# Altium PCB PCB_v2.PcbDoc
Units mm, origin at the board's own origin, x right, y up, seen from the top; angles counter-clockwise.
Board outline 100 x 100 mm, 2 copper layers (Top Layer, Bottom Layer); 42 components, 45 nets, 150 pads, 0 vias.
Unrouted connection lines stored in the file: 13.
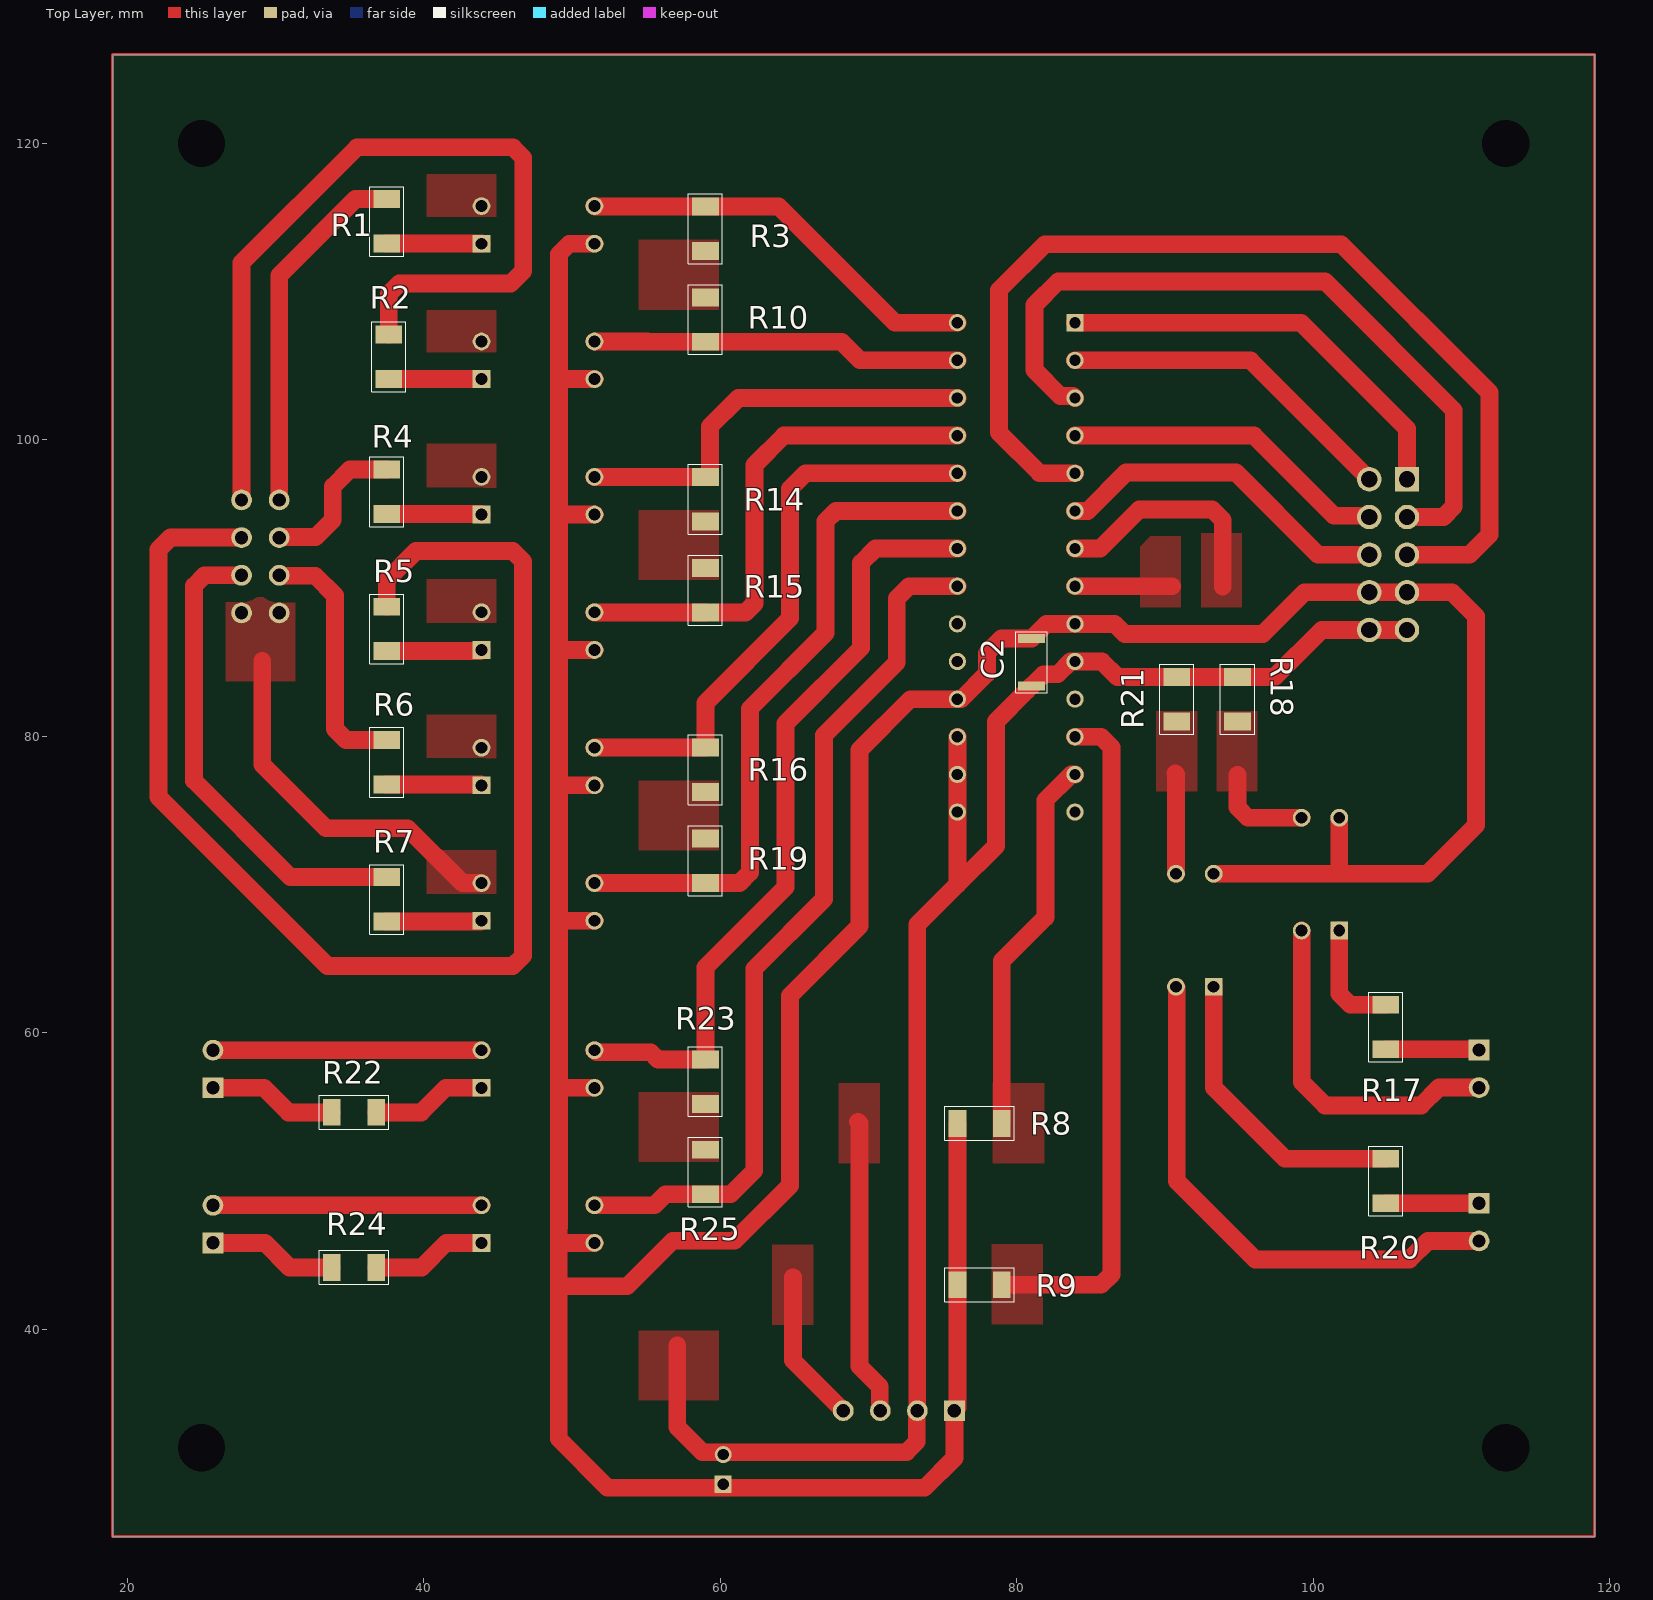
[diagram p0: Top Layer view]
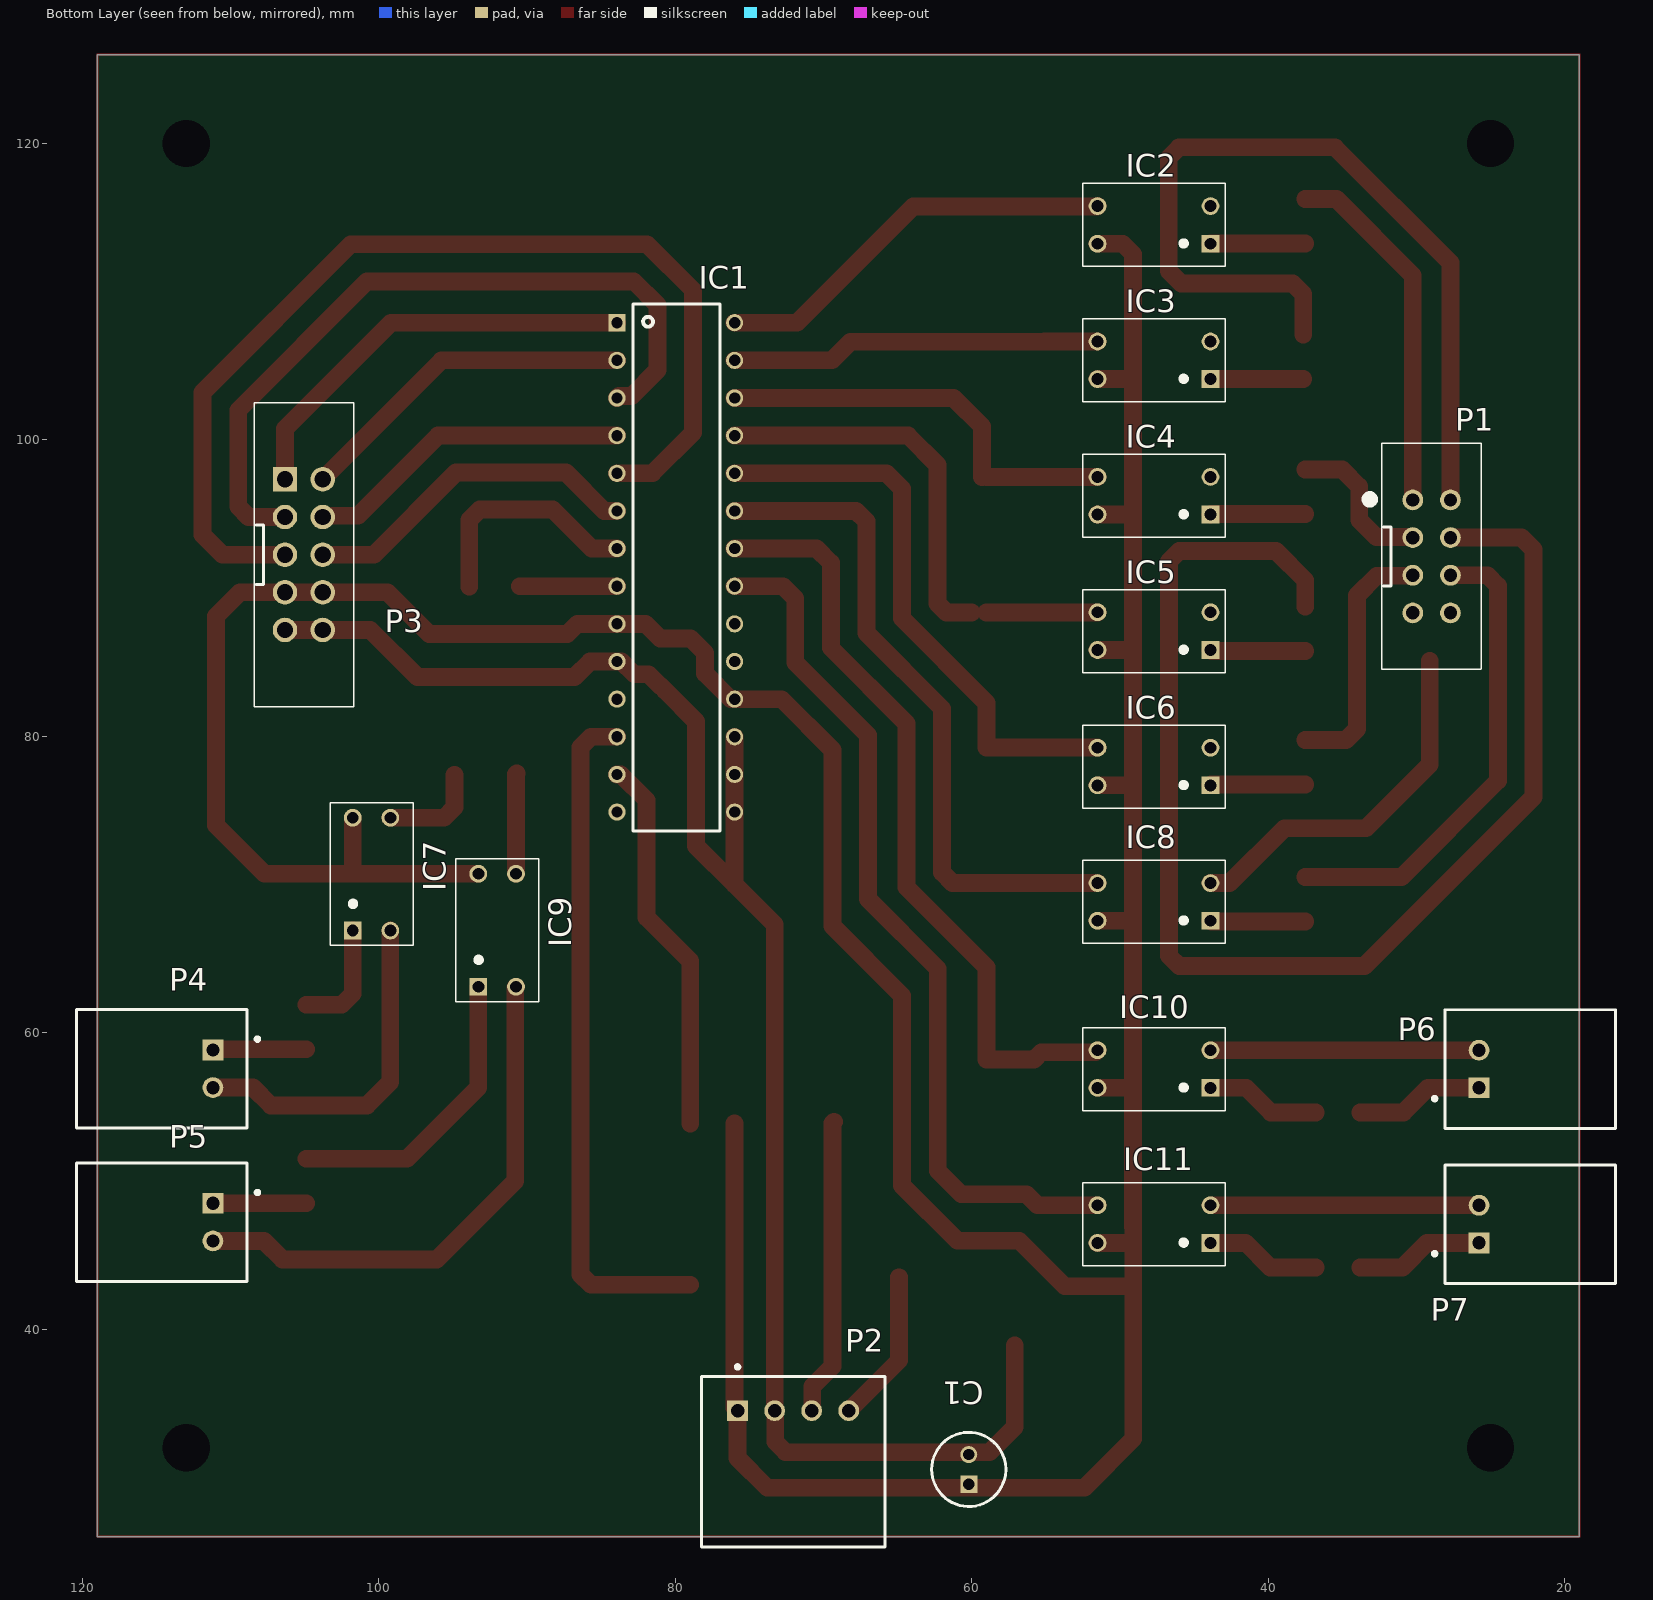
[diagram p1: Bottom Layer view, seen from below]
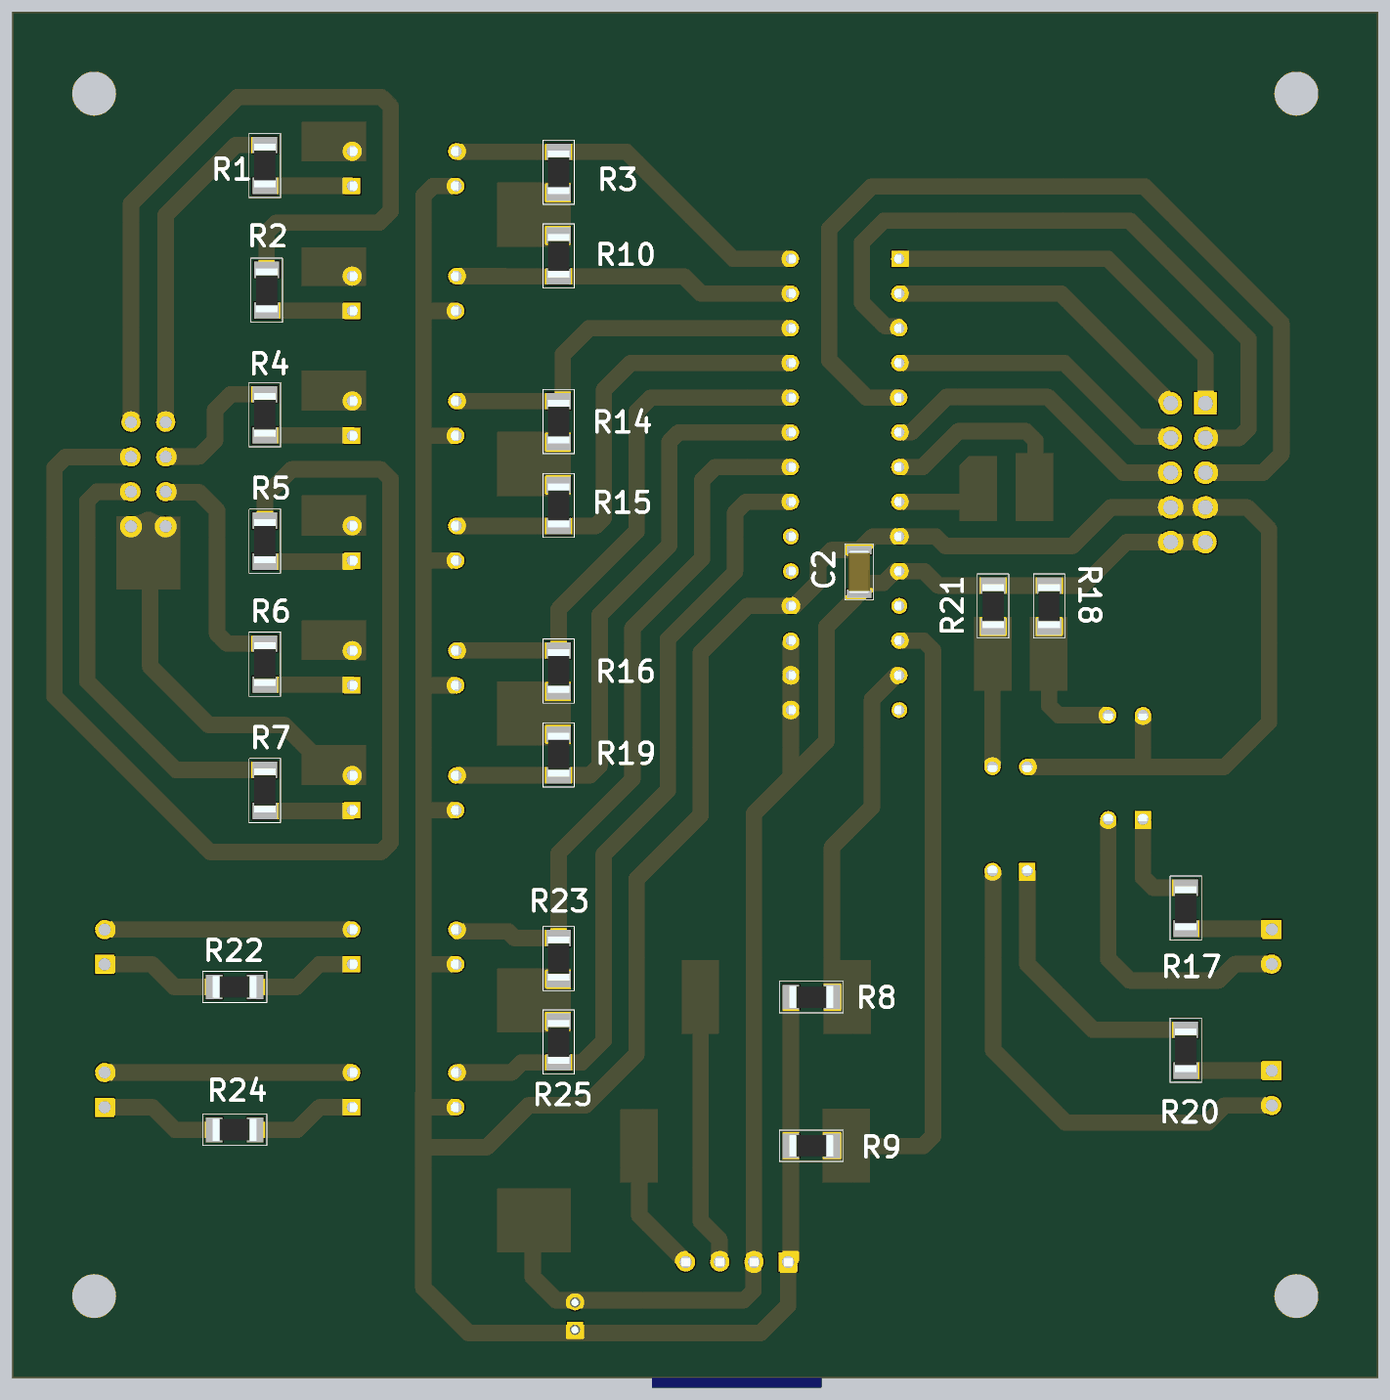
[diagram p2: 3D render of the assembled board from above, using the file's embedded part models]
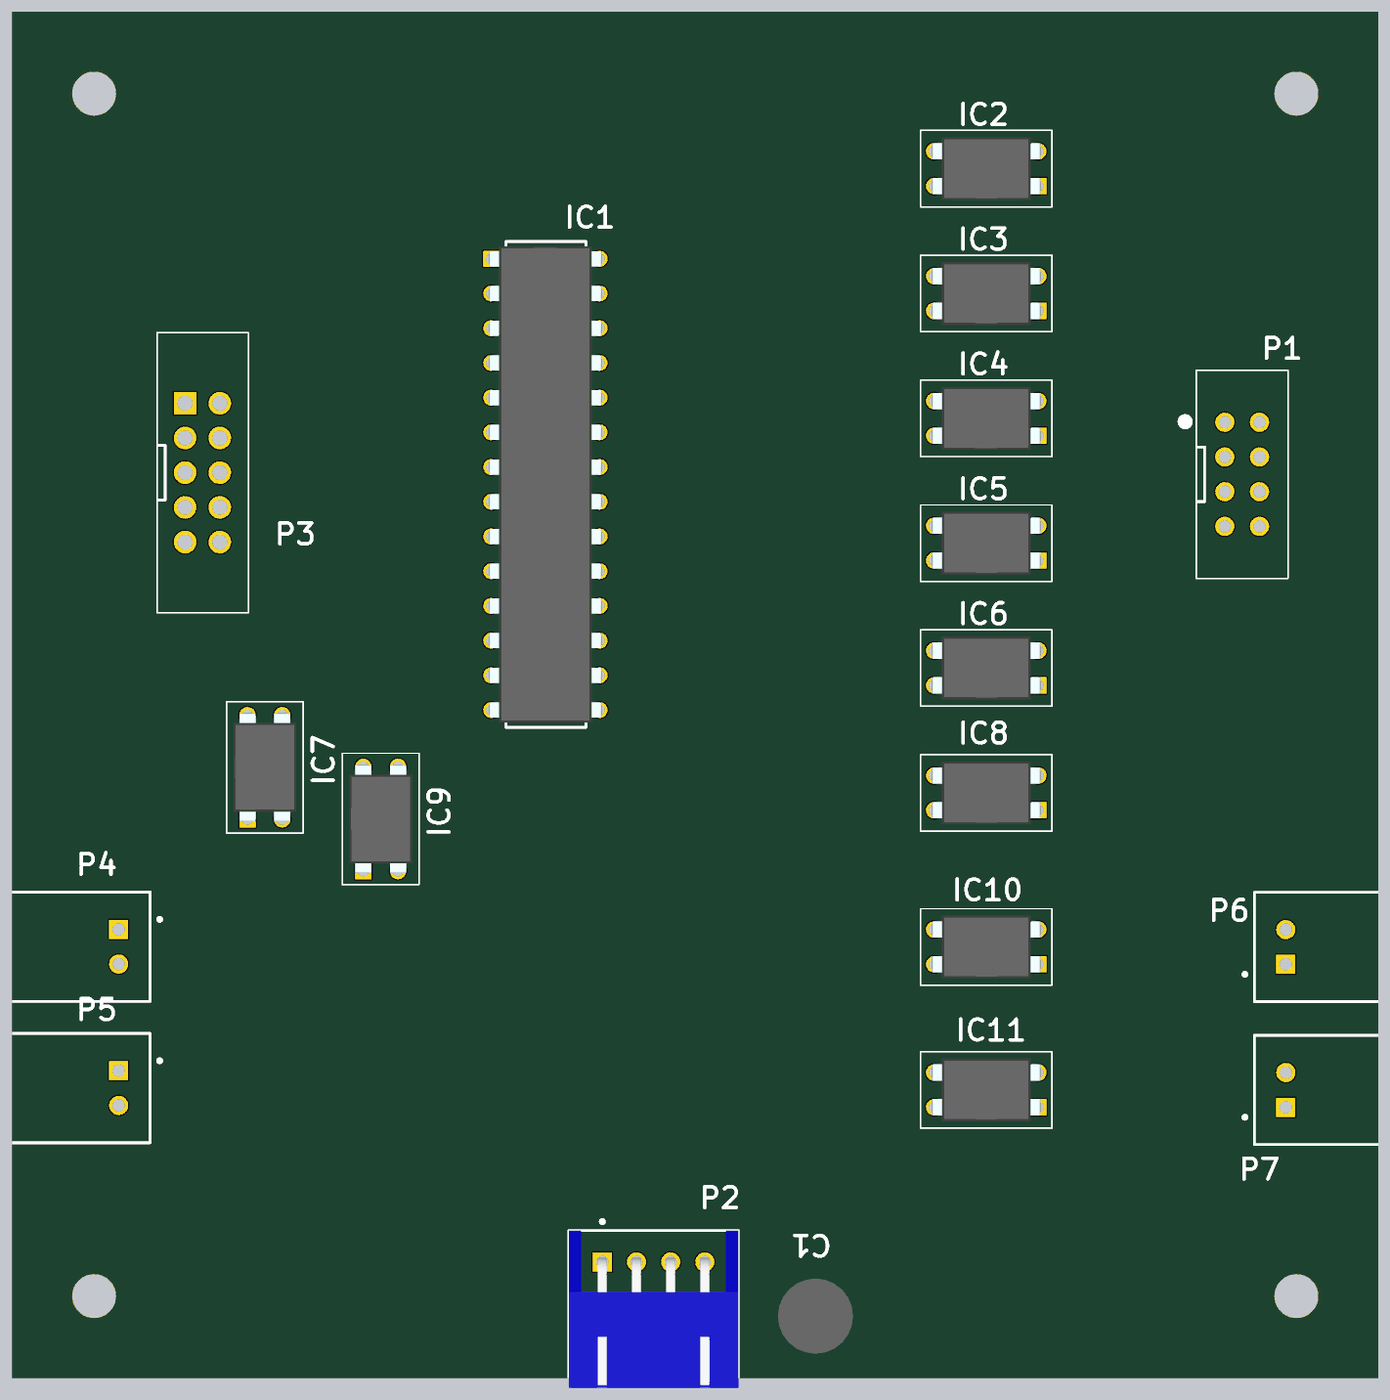
[diagram p3: 3D render of the assembled board from below, using the file's embedded part models]

## Layer stack, top to bottom
Top Solder: solder mask 0.0102, Solder Resist, Dk 3.5
Top Layer: signal copper 0.0356
Dielectric 1: dielectric 0.32, FR-4, Dk 4.8
Bottom Layer: signal copper 0.0356
Bottom Solder: solder mask 0.0102, Solder Resist, Dk 3.5

## Board outline
19,26 119,26 119,126 19,126

## Design rules (kind name [scope] priority, off if disabled: settings)
Clearance [All] p1: gap=1 ignorepadtopadclearanceinfootprint=FALSE except(0.5: THPad-THPad THPad-Fill THPad-Poly THPad-Region Via-Via Via-Fill Via-Poly Via-Region; 0.8: Arc-THPad Track-THPad; 1.2: Arc-Arc Arc-Track Arc-Fill Arc-Poly Arc-Region Track-Track Track-Fill Track-Poly Track-Region Fill-Fill Fill-Poly Fill-Region Poly-Poly Poly-Region Region-Region; 1.5: Arc-SMDPad Track-SMDPad SMDPad-Fill SMDPad-Poly SMDPad-Region)
ComponentClearance [All] p1: gap=1 collisioncheckmode=3 verticalgap=0.254 showdistances=FALSE
PolygonConnect [All] p1: thpad.connectstyle=Direct thpad.reliefconductorwidth=0.254 thpad.reliefentries=4 thpad.polygonreliefangle="90 Angle" thpad.airgapwidth=0.254 smdpad.connectstyle=Direct smdpad.reliefconductorwidth=0.254 smdpad.reliefentries=4 smdpad.polygonreliefangle="90 Angle" smdpad.airgapwidth=0.254 via.connectstyle=Relief via.reliefconductorwidth=0.254 via.reliefentries=4 via.polygonreliefangle="90 Angle" via.airgapwidth=0.254
RoutingVias [All] p1: holewidth=0.711 width=1.27 viastyle="Through Hole" minholewidth=0.711 minwidth=1.27 maxholewidth=0.711 maxwidth=1.27
SolderMaskExpansion [All] p1: expansion=0.102 istentingtop=FALSE
Width [All] p1: maxlimit=1.2 minlimit=1.2 preferedwidth=1.2
29 further rules are at their usual default settings.

## Components (designator, comment, footprint, x,y, rotation, side; value= is the part's Value field where it differs from the comment)
C1 "EEU-FR1V330" CAPPRD200W55D500H1250 60.201,29.536 r90 bottom
C2 "C3216C0G1H683J160AE" CAPC3216X180N 81,85 r90 top
IC1 "MCP23017-E_SP" DIP794W56P254L3486H508Q28N 79.969,91.4 r180 bottom
IC2 "LTV-817-B" DIP762W60P254L460H420Q4N 47.701,114.508 r0 bottom
IC3 "LTV-817-B" DIP762W60P254L460H420Q4N 47.701,105.372 r0 bottom
IC4 "LTV-817-B" DIP762W60P254L460H420Q4N 47.701,96.236 r0 bottom
IC5 "LTV-817-B" DIP762W60P254L460H420Q4N 47.701,87.1 r0 bottom
IC6 "LTV-817-B" DIP762W60P254L460H420Q4N 47.701,77.964 r0 bottom
IC7 "LTV-817-B" DIP762W60P254L460H420Q4N 100.5,70.7 r90 bottom
IC8 "LTV-817-B" DIP762W60P254L460H420Q4N 47.701,68.828 r0 bottom
IC9 "LTV-817-B" DIP762W60P254L460H420Q4N 92.023,66.918 r90 bottom
IC10 "LTV-817-B" DIP762W60P254L460H420Q4N 47.701,57.552 r0 bottom
IC11 "LTV-817-B" DIP762W60P254L460H420Q4N 47.701,47.091 r0 bottom
P1 "IDC-8pin" IDC-8PIN 28.97,92.14 r270 bottom
P2 "S4B-XH-A(LF)(SN)" JST-S4B-XH-A(LF)(SN)_V 72.05,34.5 r180 bottom
P3 "IDC-10pin" IDC-10PIN 105.05,92.26 r270 bottom
P4 "2-pin_connector" 2-pin_connector 111.2,57.57 r270 bottom
P5 "2-pin_connector" 2-pin_connector 111.2,47.224 r270 bottom
P6 "2-pin_connector" 2-pin_connector 25.771,57.552 r90 bottom
P7 "2-pin_connector" 2-pin_connector 25.771,47.091 r90 bottom
R1 "CR1206-FW-1504ELF" RESC3216X75N 37.5,114.75 r90 top
R2 "CR1206-FW-1504ELF" RESC3216X75N 37.633,105.61 r90 top
R3 "CR1206-FW-1504ELF" RESC3216X75N 59,114.25 r270 top
R4 "CR1206-FW-1504ELF" RESC3216X75N 37.5,96.5 r90 top
R5 "CR1206-FW-1504ELF" RESC3216X75N 37.5,87.25 r90 top
R6 "CR1206-FW-1504ELF" RESC3216X75N 37.5,78.25 r90 top
R7 "CR1206-FW-1504ELF" RESC3216X75N 37.5,69 r90 top
R8 "CR1206-FW-1504ELF" RESC3216X75N 77.5,53.881 r180 top
R9 "CR1206-FW-1504ELF" RESC3216X75N 77.5,43 r180 top
R10 "CR1206-FW-1504ELF" RESC3216X75N 59,108.121 r90 top
R14 "CR1206-FW-1504ELF" RESC3216X75N 59,96 r270 top
R15 "CR1206-FW-1504ELF" RESC3216X75N 59,89.861 r90 top
R16 "CR1206-FW-1504ELF" RESC3216X75N 59,77.75 r270 top
R17 "CR1206-FW-1504ELF" RESC3216X75N 104.9,60.392 r90 top
R18 "CR1206-FW-1504ELF" RESC3216X75N 94.9,82.5 r90 top
R19 "CR1206-FW-1504ELF" RESC3216X75N 59,71.611 r90 top
R20 "CR1206-FW-1504ELF" RESC3216X75N 104.9,50 r90 top
R21 "CR1206-FW-1504ELF" RESC3216X75N 90.8,82.5 r90 top
R22 "CR1206-FW-1504ELF" RESC3216X75N 35.291,54.627 r0 top
R23 "CR1206-FW-1504ELF" RESC3216X75N 59,56.7 r270 top
R24 "CR1206-FW-1504ELF" RESC3216X75N 35.291,44.166 r0 top
R25 "CR1206-FW-1504ELF" RESC3216X75N 59,50.6 r90 top

## Footprints (in the part's own frame and the unit in brackets; to place one, negate y for a bottom-side part, rotate by r counter-clockwise, add the part's x,y. Pads: shape width x height; smd on the part's side, far side on the other; paste and mask are expansions set on the pad)
2-pin_connector [mm] "Шаг 2.54мм"
  rect 1.4x1.4 hole 0.9: 1(-1.27,0)
  round 1.4 hole 0.9: 2(1.27,0)
  silkscreen extent -4,-9.2 4,3.12
CAPC3216X180N [mm]
  rect 0.62x1.82 smd: 1(-1.6,0) 2(1.6,0)
  silkscreen extent -2.06,-1.06 2.06,1.06, body extent -1.6,-0.8 1.6,0.8, height 1.8
CAPPRD200W55D500H1250 [mm]
  rect 1.15x1.15 hole 0.75: 1(0,0)
  round 1.15 hole 0.75: 2(2,0)
  silkscreen extent -1.5,-2.5 3.5,2.5, body extent -1.75,-2.75 3.75,2.75, height 12.5
DIP762W60P254L460H420Q4N [mm]
  rect 1.2x1.2 hole 0.8: 1(-3.81,1.27)
  round 1.2 hole 0.8: 2(-3.81,-1.27) 3(3.81,-1.27) 4(3.81,1.27)
  silkscreen extent -4.81,-2.8 4.81,2.8, body extent -3.96,-2.3 3.96,2.3, height 4.2
DIP794W56P254L3486H508Q28N [mm]
  rect 1.159x1.159 hole 0.759: 1(-3.969,16.51)
  round 1.159 hole 0.759: 2(-3.969,13.97) 3(-3.969,11.43) 4(-3.969,8.89) 5(-3.969,6.35) 6(-3.969,3.81) 7(-3.969,1.27) 8(-3.969,-1.27) 9(-3.969,-3.81) 10(-3.969,-6.35) 11(-3.969,-8.89) 12(-3.969,-11.43) 13(-3.969,-13.97) 14(-3.969,-16.51) 15(3.969,-16.51) 16(3.969,-13.97) 17(3.969,-11.43) 18(3.969,-8.89) 19(3.969,-6.35) 20(3.969,-3.81) 21(3.969,-1.27) 22(3.969,1.27) 23(3.969,3.81) 24(3.969,6.35) 25(3.969,8.89) 26(3.969,11.43) 27(3.969,13.97) 28(3.969,16.51)
  silkscreen extent -2.88,-17.78 2.98,17.78, body extent -4.11,-17.43 4.11,17.43, height 5.08
IDC-8PIN [mm]
  round 1.4 hole 0.9: 1(-3.81,-1.27) 2(-3.81,1.27) 3(-1.27,-1.27) 4(-1.27,1.27) 5(1.27,-1.27) 6(1.27,1.27) 7(3.81,-1.27) 8(3.81,1.27)
  silkscreen extent -7.62,-4.38 7.62,3.35
IDC-10PIN [mm]
  rect 1.65x1.65 hole 1.1: 1(-5.08,-1.29)
  round 1.65 hole 1.1: 2(-5.08,1.25) 3(-2.54,-1.29) 4(-2.54,1.25) 5(0,-1.29) 6(0,1.25) 7(2.54,-1.29) 8(2.54,1.25) 9(5.08,-1.29) 10(5.08,1.25)
  silkscreen extent -10.25,-3.35 10.25,3.35
JST-S4B-XH-A(LF)(SN)_V [mm] "Header, 4-Leads, Body 12.4x11.5mm, Pitch 2.5mm"
  rect 1.4x1.4 hole 0.9: 1(-3.75,0)
  round 1.4 hole 0.9: 2(-1.25,0) 3(1.25,0) 4(3.75,0)
  silkscreen extent -6.2,-9.2 6.2,3.08, body extent -6.2,-9.2 6.2,2.3, height 6.15
RESC3216X75N [mm]
  rect 1.2x1.8 smd: 1(-1.5,0) 2(1.5,0)
  silkscreen extent -2.35,-1.15 2.35,1.15, body extent -1.6,-0.8 1.6,0.8, height 0.75

## Part data
C1: "Capacitor Polarised", Manufacturer_Name=Panasonic, Mouser Part Number=667-EEU-FR1V330, Datasheet Link=https://componentsearchengine.com/Datasheets/1/EEU-FR1V330.pdf, Height=12.5mm, Manufacturer_Part_Number=EEU-FR1V330, Mouser Price/Stock=http://www.mouser.com/Search/ProductDetail.aspx?qs=ob%252bdNz2%252bYEhHeC0uCpfxxQ%3d%3d
C2: "Capacitor", Manufacturer_Name=TDK, Mouser Part Number=810-C3216C0G1H683J16, Datasheet Link=https://product.tdk.com/info/en/catalog/datasheets/mlcc_commercial_midvoltage_en.pdf, Height=1.8mm, Manufacturer_Part_Number=C3216C0G1H683J160AE, Mouser Price/Stock=https://www.mouser.co.uk/ProductDetail/TDK/C3216C0G1H683J160AE?qs=P1JMDcb91o7iXP%252BmsCRcbg%3D%3D
IC1: "Integrated Circuit", Arrow Part Number=MCP23017-E/SP, Manufacturer_Name=Microchip, Mouser Part Number=579-MCP23017-E/SP, Arrow Price/Stock=https://www.arrow.com/en/products/mcp23017-esp/microchip-technology, Datasheet Link=http://docs-emea.rs-online.com/webdocs/137e/0900766b8137eed4.pdf, Height=5.08mm, Manufacturer_Part_Number=MCP23017-E/SP, Mouser Price/Stock=https://www.mouser.co.uk/ProductDetail/Microchip-Technology/MCP23017-E-SP?qs=usxtMOJb1RyESXZDw7ia5A%3D%3D
IC2 IC3 IC4 IC5 IC6 IC7 IC8 IC9 IC10 IC11: "Integrated Circuit", Manufacturer_Name=Lite-On, Mouser Part Number=N/A, Arrow Part Number=LTV-817-B, Arrow Price/Stock=https://www.arrow.com/en/products/ltv-817-b/lite-on-technology, Datasheet Link=http://optoelectronics.liteon.com/upload/download/DS-70-96-0016/LTV-8X7%20series%20201610%20.pdf, Height=4.2mm, Manufacturer_Part_Number=LTV-817-B, Mouser Price/Stock=https://www.mouser.co.uk/ProductDetail/Lite-On/LTV-817-B?qs=5Clb0NIqk7HzP4M9tIz87Q%3D%3D
P2: "Male Header, Pitch 2.5 mm, 1 x 4 Position, Height 6.1 mm, Tail Length 3.4 mm, -25 to 85 degC, RoHS, Bulk", ComponentLink1Description="Manufacturer URL", ComponentLink1URL=http://www.jst.com/home2.html, ComponentLink2Description=Datasheet, ComponentLink2URL=http://www.jst-mfg.com/product/pdf/eng/eXH.pdf, DatasheetVersion=May-16, PackageDescription="Male Header, Pitch 2.5 mm, 1 x 4 Position, Height 6.1 mm, Tail Length 3.4 mm", PackageReference=S4B-XH-A(LF)(SN)
R1 R2 R3 R4 R5 R6 R7 R8 R9 R10 R14 R15 R16 R17 R18 R19 R20 R21 R22 R23 R24 R25: "Resistor", Manufacturer_Name=Bourns, Mouser Part Number=652-CR1206FW1504ELF, Arrow Part Number=CR1206-FW-1504ELF, Arrow Price/Stock=https://www.arrow.com/en/products/cr1206-fw-1504elf/bourns, Datasheet Link=http://componentsearchengine.com/Datasheets/1/CR1206-FW-1504ELF.pdf, Height=0.75mm, Manufacturer_Part_Number=CR1206-FW-1504ELF, Mouser Price/Stock=https://www.mouser.co.uk/ProductDetail/Bourns/CR1206-FW-1504ELF/?qs=6oMev5NRZMFfvXkOpYL2%252BA%3D%3D
P1 P3: ComponentLink1Description="Manufacturer URL", ComponentLink2Description=Datasheet, DatasheetVersion=May-16, PackageReference=IDC-8pin
P4 P5 P6 P7: ComponentLink1Description="Manufacturer URL", ComponentLink2Description=Datasheet, DatasheetVersion=May-16

## Free pads (board coordinates)
  round 1 hole 3.2: 9(25,32) 9(25,120) 9(113,32) 9(113,120)

## Nets (pads, with @x,y where several pads share a name; then routed paths per layer and width w, separated by ;. In a path a pad name is that pad's centre, name@x,y a point inside that pad or via, vN(x,y) a via of type N, cw(c..) or ccw(c..) an arc to the next point about the centre after c; other vN are vias at no path point)
+3.3V_RPI: C1.1 C2.2 IC1.9 IC1.18 IC2.4 IC3.4 IC4.4 IC5.4 IC6.4 IC7.4 IC8.4 IC9.4 IC10.4 IC11.4 P2.1 P3.7 P3.8 R8.2 R9.2 | length 285.7
  Top Layer w1.2: 49.1,46.889 49.1,45.8 ; 49.111,46.889 49.111,56.3 ; 49.2,67.558 IC8.4 ; 49.3,42.897 53.727,42.897 56.792,45.961 60.961,45.961 64.7,49.7 64.7,62.5 69.4,67.2 69.4,79.081 72.829,82.51 IC1.18 76.259,82.51 77.99,84.241 77.99,85.621 78.969,86.6 C2.2 81.02,86.6 82.01,87.59 86.604,87.59 87.294,86.9 96.6,86.9 99.42,89.72 P3.8 P3.7 109.38,89.72 111,88.1 111,74 107.728,70.728 101.6,70.728 ; IC11.4 49.121,45.821 49.1,45.8 ; IC10.4 49.13,56.282 49.111,56.3 ; IC6.4 49.167,76.694 49.111,76.75 ; IC5.4 49.281,85.83 49.111,86 ; IC4.4 49.145,94.966 49.111,95 ; IC3.4 49.214,104.102 49.111,104 ; IC2.4 49.814,113.238 49.111,112.535 49.111,104 ; R8.2 76,53.581 R9.2 76,34.7 P2.1 75.8,31.3 73.8,29.3 52.4,29.3 49.1,32.6 49.1,45.8 ; IC9.4 101.6,70.728 ; IC7.4 101.77,70.898 101.6,70.728 ; 49.111,56.3 49.111,76.75 ; 49.111,76.75 49.111,86 ; 49.111,86 49.111,95 ; 49.111,95 49.111,104
ADD_SIG_1: IC1.7 IC7.3 R18.1 | length 22.6
  Top Layer w1.2: IC1.7 85.646,92.67 88.276,95.3 93.197,95.3 93.9,94.597 93.9,90.1 ; 94.9,77.4 94.9,75.213 95.603,74.51 IC7.3
ADD_SIG_2: IC1.8 IC9.3 R21.1 | length 13.4
  Top Layer w1.2: IC1.8 90.5,90.13 ; 90.7,77.5 90.753,77.447 IC9.3
ADD_SIG_3: IC1.22 IC10.3 R23.1 | length 52.5
  Top Layer w1.2: IC10.3 51.651,58.682 55.318,58.682 55.8,58.2 R23.1 59,64.419 64.4,69.819 64.4,80.869 69.506,85.976 69.506,91.706 70.47,92.67 IC1.22
ADD_SIG_4: IC1.21 IC11.3 R25.1 | length 58.8
  Top Layer w1.2: IC11.3 55.561,48.361 56.3,49.1 R25.1 60.706,49.1 62.3,50.694 62.3,64.325 67,69.025 67,80.075 71.906,84.981 71.906,89.306 72.73,90.13 IC1.21
ARD_SIG_1: IC1.1 P3.1 | length 28.8
  Top Layer w1.2: IC1.1 99.19,107.91 106.34,100.76 P3.1
ARD_SIG_2: IC1.2 P3.2 | length 23.2
  Top Layer w1.2: IC1.2 95.77,105.37 P3.2
ARD_SIG_3: IC1.3 P3.3 | length 50.4
  Top Layer w1.2: IC1.3 83.798,102.97 82.944,102.97 81.2,104.714 81.2,109.1 82.8,110.7 100.8,110.7 109.5,102 109.5,95.503 108.797,94.8 P3.3
ARD_SIG_4: IC1.4 P3.4 | length 22.1
  Top Layer w1.2: IC1.4 96.01,100.29 101.414,94.886 103.714,94.886 P3.4
ARD_SIG_5: IC1.5 P3.5 | length 70.1
  Top Layer w1.2: IC1.5 81.55,97.75 78.8,100.5 78.8,110.094 81.906,113.2 101.9,113.2 111.9,103.2 111.9,93.6 110.56,92.26 P3.5
ARD_SIG_6: IC1.6 P3.6 | length 23.2
  Top Layer w1.2: IC1.6 84.792,95.21 87.382,97.8 94.794,97.8 100.334,92.26 P3.6
LAMP_SIG_1: IC1.28 IC2.3 R3.1 | length 27.7
  Top Layer w1.2: IC2.3 51.541,115.749 58.348,115.749 58.349,115.75 R3.1 63.95,115.75 71.79,107.91 IC1.28
LAMP_SIG_2: IC1.27 IC3.3 R10.1 | length 25
  Top Layer w1.2: IC3.3 55.095,106.642 55.117,106.621 R10.1 68.179,106.621 69.43,105.37 IC1.27
LAMP_SIG_3: IC1.26 IC4.3 R14.1 | length 28.4
  Top Layer w1.2: IC4.3 55.103,97.506 55.109,97.5 R14.1 ; R14.1@59.3,97.5 59.3,100.9 61.23,102.83 IC1.26
LAMP_SIG_4: IC1.25 IC5.3 R15.1 | length 33.9
  Top Layer w1.2: IC5.3 51.52,88.361 R15.1 ; 60.023,88.351 61.7,88.351 62.306,88.958 62.306,98.306 64.29,100.29 IC1.25
LAMP_SIG_5: IC1.24 IC6.3 R16.1 | length 39
  Top Layer w1.2: IC6.3 51.528,79.251 58.699,79.251 R16.1 59,82.257 64.706,87.964 64.706,90.589 64.706,96.706 65.75,97.75 IC1.24
LAMP_SIG_6: IC1.23 IC8.3 R19.1 | length 45.8
  Top Layer w1.2: IC8.3 51.524,70.111 R19.1 61.297,70.111 62,70.813 62,81.863 67.106,86.97 67.106,89.595 67.106,94.507 67.809,95.21 IC1.23
NetIC2_1: IC2.1 R1.1 | length 6.4
  Top Layer w1.2: R1.1 43.88,113.25 IC2.1
NetIC3_1: IC3.1 R2.1 | length 6.3
  Top Layer w1.2: R2.1 43.884,104.11 IC3.1
NetIC4_1: IC4.1 R4.1 | length 6.4
  Top Layer w1.2: R4.1 43.858,95 IC4.1
NetIC5_1: IC5.1 R5.1 | length 6.4
  Top Layer w1.2: R5.1 43.811,85.75 IC5.1
NetIC6_1: IC6.1 R6.1 | length 6.4
  Top Layer w1.2: R6.1 43.836,76.75 IC6.1
NetIC7_1: IC7.1 R17.2 | length 7.7
  Top Layer w1.2: IC7.1 101.77,62.63 102.508,61.892 R17.2
NetIC7_2: IC7.2 P4.2 | length 23.3
  Top Layer w1.2: IC7.2 99.23,56.67 100.8,55.1 107.3,55.1 108.5,56.3 P4.2
NetIC8_1: IC8.1 R7.1 | length 6.4
  Top Layer w1.2: R7.1 43.833,67.5 IC8.1
NetIC9_1: IC9.1 R20.2 | length 20.4
  Top Layer w1.2: IC9.1 93.3,63.101 93.3,56.3 98.1,51.5 R20.2
NetIC9_2: IC9.2 P5.2 | length 36.2
  Top Layer w1.2: IC9.2 90.8,63.061 90.8,50 96.1,44.7 106.5,44.7 107.754,45.954 P5.2
NetIC10_1: IC10.1 R22.2 | length 7.8
  Top Layer w1.2: R22.2 39.827,54.627 41.482,56.282 IC10.1
NetIC10_2: IC10.2 P6.2 | length 18.1
  Top Layer w1.2: P6.2 IC10.2
NetIC11_1: IC11.1 R24.2 | length 7.8
  Top Layer w1.2: R24.2 39.866,44.166 41.521,45.821 IC11.1
NetIC11_2: IC11.2 P7.2 | length 18.1
  Top Layer w1.2: P7.2 IC11.2
NetP1_1: P1.1 R1.2 | length 24.5
  Top Layer w1.2: P1.1 30.24,111.096 35.394,116.25 R1.2
NetP1_2: P1.2 R2.2 | length 58.6
  Top Layer w1.2: P1.2 27.7,111.95 35.5,119.75 46.008,119.75 46.711,119.047 46.711,111.403 45.858,110.55 38.336,110.55 37.633,109.847 R2.2
NetP1_3: P1.3 R4.2 | length 10.5
  Top Layer w1.2: P1.3 30.278,93.448 32.698,93.448 33.849,94.599 33.849,96.849 35,98 R4.2
NetP1_4: P1.4 R5.2 | length 90.9
  Top Layer w1.2: P1.4 22.903,93.41 22.1,92.607 22.1,75.9 33.5,64.5 45.997,64.5 46.7,65.203 46.7,91.797 45.997,92.5 39.47,92.5 37.5,90.53 R5.2
NetP1_5: P1.5 R6.2 | length 17.1
  Top Layer w1.2: P1.5 30.278,90.832 32.668,90.832 34,89.5 34,80.5 34.75,79.75 R6.2
NetP1_6: P1.6 R7.2 | length 32.4
  Top Layer w1.2: P1.6 25.203,90.87 24.5,90.167 24.5,77 31,70.5 R7.2
NetP4_1: P4.1 R17.1 | length 6.3
  Top Layer w1.2: R17.1 R17.1@105.2,58.892 ; R17.1@105.2,58.891 111.149,58.891 P4.1
NetP5_1: P5.1 R20.1 | length 6.3
  Top Layer w1.2: R20.1 111.194,48.5 P5.1
NetP6_1: P6.1 R22.1 | length 8.7
  Top Layer w1.2: P6.1 29.218,56.282 30.873,54.627 R22.1
NetP7_1: P7.1 R24.1 | length 8.7
  Top Layer w1.2: P7.1 29.279,45.821 30.934,44.166 R24.1
RPI_GND: C1.2 C2.1 IC1.10 IC1.15 IC1.16 IC1.17 P2.2 P3.9 P3.10 R3.2 R10.2 R14.2 R15.2 R16.2 R18.2 R19.2 R21.2 R23.2 R25.2 | length 114.6
  Top Layer w1.2: 57.1,38.9 57.1,33.4 58.8,31.7 60.201,31.7 72.559,31.7 73.262,32.403 73.262,34.462 P2.2 73.3,67.3 76,70 ; IC1.17 IC1.16 IC1.15 76,70 ; C2.1 80.98,83.4 80.69,83.11 80.69,83.09 78.603,81.003 78.603,72.603 76,70 ; C2.1@81.02,83.4 81.81,84.19 82.78,84.19 83.64,85.05 85.75,85.05 86.8,84 97.4,84 100.58,87.18 P3.10 P3.9
SCL: IC1.12 P2.4 R9.1 | length 56.4
  Top Layer w1.2: 64.9,43.5 64.9,37.9 P2.4 ; R9.1 79,42.99 85.697,42.99 86.4,43.693 86.4,79.267 85.697,79.97 IC1.12
SDA: IC1.13 P2.3 R8.1 | length 45.9
  Top Layer w1.2: 69.3,54 69.4,53.9 69.4,37.5 70.762,36.138 70.762,34.538 P2.3 ; R8.1 79,64.841 81.939,67.78 81.939,75.691 83.679,77.43 IC1.13
SIG_GND: IC2.2 IC3.2 IC4.2 IC5.2 IC6.2 IC8.2 P1.7 P1.8 | length 25.1
  Top Layer w1.2: 29.1,85.094 29.1,78.1 33.4,73.8 38.9,73.8 42.602,70.098 IC8.2
pads on no net: IC1.11 IC1.14 IC1.19 IC1.20
copper on no net: | length 400
  Top Layer w0.2: 19,26 119,26 119,126 19,126 19,26

## Polygon pours and split planes (outlines as drawn)
ADD_SIG_2 on Top Layer "ADD_SIG_2_L01_P050" (solid, pour order 50): 89.425,76.3 89.425,81.7 92.175,81.7 92.175,76.3
ADD_SIG_1 on Top Layer "ADD_SIG_1_L01_P049" (solid, pour order 49): 93.5,76.3 93.5,81.7 96.25,81.7 96.25,76.3
ADD_SIG_2 on Top Layer "ADD_SIG_2_L01_P048" (solid, pour order 48): 88.325,88.3 88.325,93.7 91.075,93.7 91.075,88.3
ADD_SIG_1 on Top Layer "ADD_SIG_1_L01_P047" (solid, pour order 47): 92.45,88.3 92.45,93.7 95.2,93.7 95.2,88.3
SCL on Top Layer "SCL_L01_P046" (solid, pour order 46): 78.324,40.323 78.324,45.723 81.774,45.723 81.774,40.323
SDA on Top Layer "SDA_L01_P045" (solid, pour order 45): 78.4,51.2 78.4,56.6 81.85,56.6 81.85,51.2
SCL on Top Layer "SCL_L01_P042" (solid, pour order 42): 63.525,40.3 63.525,45.7 66.275,45.7 66.275,40.3
SDA on Top Layer "SDA_L01_P043" (solid, pour order 43): 68,51.2 68,56.6 70.75,56.6 70.75,51.2
RPI_GND on Top Layer "RPI_GND_L01_P038" (solid, pour order 38): 54.5,39.9 59.9,39.9 59.9,35.2 54.5,35.2
RPI_GND on Top Layer "RPI_GND_L01_P037" (solid, pour order 37): 54.5,55.989 59.9,55.989 59.9,51.289 54.5,51.289
SIG_GND on Top Layer "SIG_GND_L01_P036" (solid, pour order 36): 40.2,118.008 44.9,118.008 44.9,115.063 40.2,115.063
SIG_GND on Top Layer "SIG_GND_L01_P035" (solid, pour order 35): 40.2,108.872 44.9,108.872 44.9,105.927 40.2,105.927
SIG_GND on Top Layer "SIG_GND_L01_P034" (solid, pour order 34): 40.2,99.736 44.9,99.736 44.9,96.791 40.2,96.791
SIG_GND on Top Layer "SIG_GND_L01_P033" (solid, pour order 33): 40.2,72.328 44.9,72.328 44.9,69.383 40.2,69.383
SIG_GND on Top Layer "SIG_GND_L01_P032" (solid, pour order 32): 40.2,81.464 44.9,81.464 44.9,78.519 40.2,78.519
RPI_GND on Top Layer "RPI_GND_L01_P031" (solid, pour order 31): 54.5,113.5 59.9,113.5 59.9,108.8 54.5,108.8
RPI_GND on Top Layer "RPI_GND_L01_P030" (solid, pour order 30): 54.5,95.25 59.9,95.25 59.9,90.55 54.5,90.55
RPI_GND on Top Layer "RPI_GND_L01_P029" (solid, pour order 29): 54.5,77 59.9,77 59.9,72.3 54.5,72.3
no net on Top Layer "NONET_L01_P028" (solid, pour order 28): 29.1,87.2
SIG_GND on Top Layer "SIG_GND_L01_P027" (solid, pour order 27): 26.63,89.4 31.33,89.4 31.33,83.701 26.63,83.701
SIG_GND on Top Layer "SIG_GND_L01_P024" (solid, pour order 24): 40.2,90.6 44.9,90.6 44.9,87.655 40.2,87.655
no net on Top Layer "NONET_L01_P015" (solid, pour order 15): 105.75,87.75
no net on Top Layer "NONET_L01_P010" (solid, pour order 10): 45,123.5
SIG_GND on Top Layer "SIG_GND_L01_P008" (solid, pour order 8): 31.4,112.4
SIG_GND on Top Layer "SIG_GND_L01_P006" (solid, pour order 6): 73.5,93.9
SIG_GND on Top Layer "SIG_GND_L01_P004" (solid, pour order 4): 68.85,76.425
no net on Top Layer "NONET_L01_P001" (solid, pour order 1): 134,64

## Silkscreen, mask and mechanical layers (free items; w line width, h text height)
Mechanical 15:
  lines w0.2: 21,28 117,28 117,124 21,124 21,28